# EAGLE board ciabatta (EAGLE 4.16)
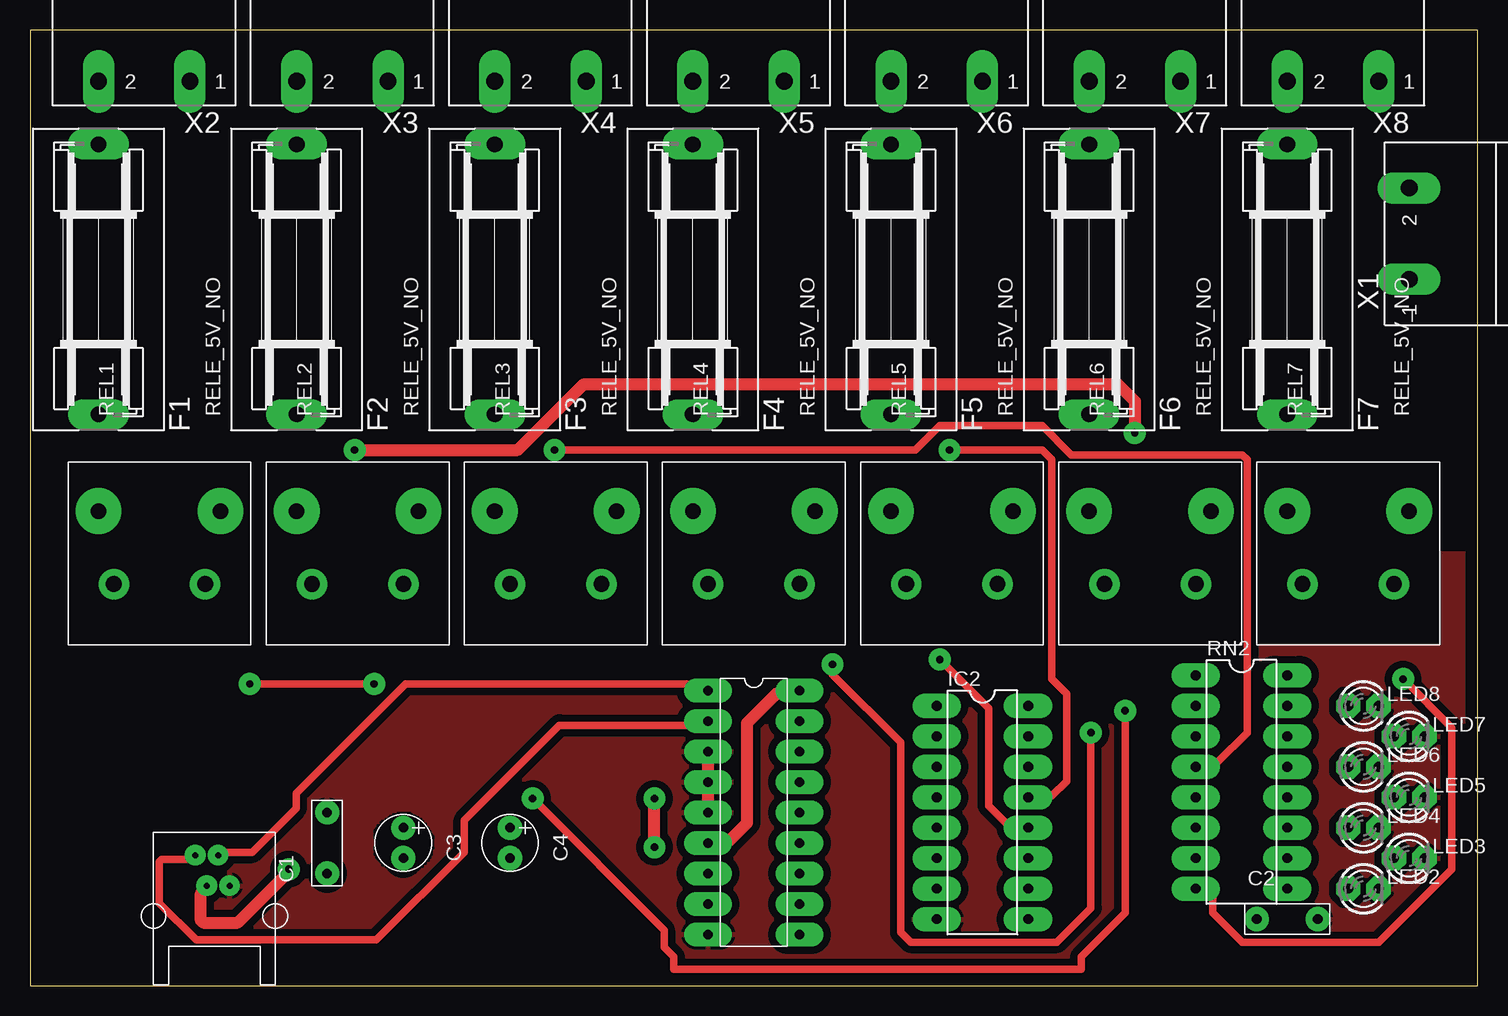
[diagram p0: board, top side]
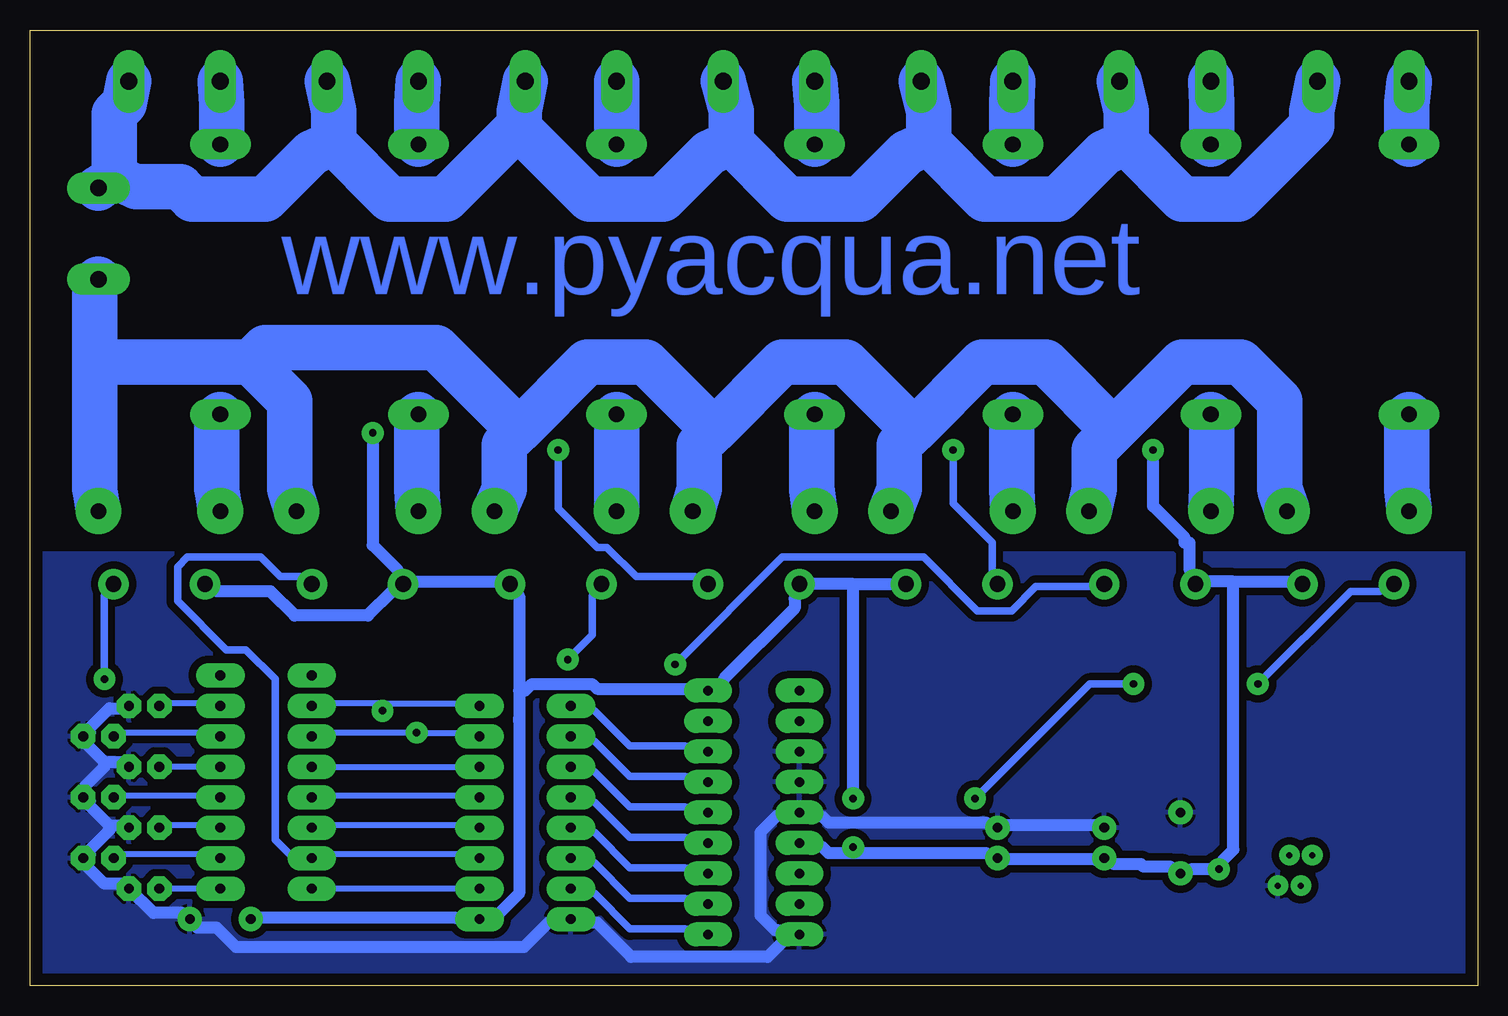
[diagram p1: board, bottom side, seen from below]

Size 120.63 x 79.68 mm. Coordinates in mm from the lower left corner, seen from the top.
Outline: 0,0 120.63,0 120.63,79.68 0,79.68 0,0
Copper layers (1*16): Top 0.035mm / dielectric 1.5mm / Bottom 0.035mm
Design rules "mio2": minimum track width 24mil, minimum drill 24mil, track to track 24mil, track to pad 24mil, pad to pad 24mil, via to via 24mil, smd to smd 24mil, copper to edge 40mil, drill to drill 8mil, minimum pad ring 24mil, minimum via ring 24mil, stop-mask expansion 4mil, vias tented up to drill 0mil, thermal gap 10mil
Net classes: 0 signal: width 0.508 mm; 1 220: width 3.81 mm; 2 signal2: width 0.508 mm; 3 vcc: width 1.016 mm; 4 smd: width 0.203 mm

## Footprints (pad centres in the part's own frame; a part is rotated, then mirrored left to right if it is on the bottom)
CAP_POLI = drill 0.8 pad 1.93 round: P$1 -5.08,0; P$2 0,0
CAP_ELET = drill 0.8 pad 1.93 round: A -2.54,0; B 0,0
SH22,5A = drill 1.321 pad 2.54 long: 1 -11.252,0; 2 11.252,0
DIL16 = drill 0.813 long: 1 -8.89,-3.81; 2 -6.35,-3.81; 3 -3.81,-3.81; 4 -1.27,-3.81; 5 1.27,-3.81; 6 3.81,-3.81; 7 6.35,-3.81; 8 8.89,-3.81; 9 8.89,3.81; 10 6.35,3.81; 11 3.81,3.81; 12 1.27,3.81; 13 -1.27,3.81; 14 -3.81,3.81; 15 -6.35,3.81; 16 -8.89,3.81
LED3MM = drill 0.813 octagon: A -1.27,0; K 1.27,0
RELE_5V_NO = drill 1.3 pad 3.81 round: COM 6.08,-1.27; NO 6.08,8.89 | drill 1.3 pad 2.54 round: L_1 0,7.62; L_2 0,0
MCP23008_DHT = drill 0.8 long: P$1 0,0; P$2 2.54,0; P$3 5.08,0; P$4 7.62,0; P$5 10.16,0; P$6 12.7,0; P$7 15.24,0; P$8 17.78,0; P$9 20.32,0; P$10 20.32,7.62; P$11 17.78,7.62; P$12 15.24,7.62; P$13 12.7,7.62; P$14 10.16,7.62; P$15 7.62,7.62; P$16 5.08,7.62; P$17 2.54,7.62; P$18 0,7.62
J-I2C = drill 0.5 pad 1.27 round: 1 -2.54,-0.635; 2 0,0.318; 3 -2.54,1.27; 4 0,2.223
GMSTBA2 = drill 1.397 long: 1 -3.81,5.08; 2 3.81,5.08

## Placement (x,y rotation side)
C1  [CAP_POLI]  24.76,14.44 90 top
C2  [CAP_POLI]  107.31,5.55 0 top
C3  [CAP_ELET]  31.11,10.63 270 top
C4  [CAP_ELET]  40,10.63 270 top
F1  [SH22,5A]  5.71,58.89 90 top
F2  [SH22,5A]  22.22,58.89 90 top
F3  [SH22,5A]  38.73,58.89 90 top
F4  [SH22,5A]  55.24,58.89 90 top
F5  [SH22,5A]  71.75,58.89 90 top
F6  [SH22,5A]  88.26,58.89 90 top
F7  [SH22,5A]  104.77,58.89 90 top
IC2  ULN2003AN  [DIL16]  79.37,14.44 270 top
LED2  [LED3MM]  111.12,8.09 0 top
LED3  [LED3MM]  114.93,10.63 0 top
LED4  [LED3MM]  111.12,13.17 0 top
LED5  [LED3MM]  114.93,15.71 0 top
LED6  [LED3MM]  111.12,18.25 0 top
LED7  [LED3MM]  114.93,20.79 0 top
LED8  [LED3MM]  111.12,23.33 0 top
REL1  RELE_5V_NO  [RELE_5V_NO]  14.6,33.49 90 top
REL2  RELE_5V_NO  [RELE_5V_NO]  31.11,33.49 90 top
REL3  RELE_5V_NO  [RELE_5V_NO]  47.62,33.49 90 top
REL4  RELE_5V_NO  [RELE_5V_NO]  64.13,33.49 90 top
REL5  RELE_5V_NO  [RELE_5V_NO]  80.64,33.49 90 top
REL6  RELE_5V_NO  [RELE_5V_NO]  97.15,33.49 90 top
REL7  RELE_5V_NO  [RELE_5V_NO]  113.66,33.49 90 top
RN2  [DIL16]  100.96,16.98 270 top
U$1  MCP23008_DHT  [MCP23008_DHT]  56.51,24.6 270 top
U$2  [DINA4_P]  -31.12,-75.73 0 top  (outside the outline)
U$3  J-I2C  [J-I2C]  16,10.88 90 top
X1  GMSTBA2  [GMSTBA2]  120.01,62.7 90 top
X2  GMSTBA2  [GMSTBA2]  9.52,80.48 180 top
X3  GMSTBA2  [GMSTBA2]  26.03,80.48 180 top
X4  GMSTBA2  [GMSTBA2]  42.54,80.48 180 top
X5  GMSTBA2  [GMSTBA2]  59.05,80.48 180 top
X6  GMSTBA2  [GMSTBA2]  75.56,80.48 180 top
X7  GMSTBA2  [GMSTBA2]  92.07,80.48 180 top
X8  GMSTBA2  [GMSTBA2]  108.58,80.48 180 top

## Library data of the parts
C1-C4 REL1-REL7 U$1 U$3 = aggiunte
F1-F7 = fuse
IC2 = uln-udn
LED2-LED8 = led
RN2 = resistor-dil
U$2 = frames
X1-X8 = con-phoenix-508

## Nets
+5V [vcc]: C1.P$1 C2.P$1 C3.B C4.B IC2.9 REL1.L_2 REL2.L_1 REL3.L_2 REL4.L_1 REL5.L_2 REL6.L_1 REL7.L_1 U$3.3
CH1: IC2.16 REL1.L_1 RN2.2
CH2: IC2.15 REL2.L_2 RN2.3
CH3: IC2.14 REL3.L_1 RN2.4
CH4: IC2.13 REL4.L_2 RN2.5
CH5: IC2.12 REL5.L_1 RN2.6
CH6: IC2.11 REL6.L_2 RN2.7
CH7: IC2.10 REL7.L_2 RN2.8
GND: C1.P$2 C2.P$2 C3.A C4.A IC2.8 LED2.K LED3.K LED4.K LED5.K LED6.K LED7.K LED8.K U$1.P$3 U$1.P$4 U$1.P$5 U$1.P$9 U$3.1
LED1: LED2.A RN2.9
LED2: LED3.A RN2.10
LED3: LED4.A RN2.11
LED4: LED5.A RN2.12
LED5: LED6.A RN2.13
LED6: LED7.A RN2.14
LED7: LED8.A RN2.15
N$1 [220]: F3.1 REL3.NO
N$2 [vcc]: U$1.P$6 U$1.P$18
N$3: U$1.P$1 U$3.2
N$4: U$1.P$2 U$3.4
N$9 [220]: F2.1 REL2.NO
N$11 [220]: F1.1 REL1.NO
N$13 [220]: F4.1 REL4.NO
N$15 [220]: F5.1 REL5.NO
N$16 [220]: F5.2 X6.2
N$17 [220]: F4.2 X5.2
N$18 [220]: F3.2 X4.2
N$19 [220]: F7.1 REL7.NO
N$20 [220]: F6.1 REL6.NO
N$21 [220]: F6.2 X7.2
N$22 [220]: F7.2 X8.2
N$23 [220]: X1.2 X2.1 X3.1 X4.1 X5.1 X6.1 X7.1 X8.1
N$24 [220]: REL1.COM REL2.COM REL3.COM REL4.COM REL5.COM REL6.COM REL7.COM X1.1
N$25 [220]: F1.2 X2.2
N$26 [220]: F2.2 X3.2
OUT1: IC2.7 U$1.P$10
OUT2: IC2.6 U$1.P$11
OUT3: IC2.5 U$1.P$12
OUT4: IC2.4 U$1.P$13
OUT5: IC2.3 U$1.P$14
OUT6: IC2.2 U$1.P$15
OUT7: IC2.1 U$1.P$16

## Tracks (layer width: path | path; a pad name or v marks a point on that pad's centre or on a via)
+5V  (via drill 0.61)
  Top 1.016: v21.56,9.72 21.56,9.51 17.29,5.25 14.45,5.25 14.24,5.45 14.24,7.68 U$3.3 | v52.04,11.54 v52.04,15.61 | v27.05,44.67 40.66,44.67 46.15,50.15 90.65,50.15 92.07,48.73 v92.07,46.09
  Bottom 1.016: REL1.L_2 15.67,33.69 20.34,33.69 | 65.25,24.75 73.38,24.75 73.78,25.16 78.81,25.16 79.37,24.6 79.88,24.6 | 79.88,22.06 79.88,7.68 81.91,5.65 IC2.9 85.16,5.65 101.42,5.65 C2.P$1 | 79.88,22.06 79.88,22.31 | REL6.L_1 88.41,33.69 81.5,33.69 REL5.L_2 79.88,32.47 79.88,24.6 | REL7.L_1 105.07,32.88 100.6,32.88 98.57,30.85 92.48,30.85 90.44,32.88 REL6.L_1 | 20.34,33.69 22.58,33.69 REL2.L_1 24,34.71 24,36.94 24.4,36.94 24.4,37.35 27.05,39.99 v27.05,44.67 | 52.04,33.49 REL3.L_2 | 52.04,33.49 REL4.L_1 56.92,32.27 56.92,31.46 62.81,25.57 | 52.04,11.04 40.97,11.04 C4.B 39.24,10.53 31.92,10.53 C3.B 30.3,10.12 28.06,10.12 27.86,9.92 25.62,9.92 C1.P$1 23.79,9.72 v21.56,9.72 21.15,10.53 20.34,11.34 20.34,33.69 | 52.04,11.04 54.07,11.04 54.58,11.54 | 79.88,24.6 79.88,22.06 | v52.04,15.61 52.04,33.49 | 52.04,11.04 v52.04,11.54 | v92.07,46.09 92.07,36.74 90.04,34.71 REL6.L_1
CH1  (via drill 0.61)
  Top 0.61: v18.31,25.16 v28.67,25.16 | v41.88,15.61 52.85,4.64 52.85,3.21 53.66,2.4 53.66,1.38 87.6,1.38 87.6,2.4 91.26,6.06 v91.26,22.92
  Bottom 0.508: IC2.16 84.35,23.53 91.26,23.53 96.13,23.53 RN2.2
  Bottom 0.61: v18.31,25.16 10.59,32.88 8.15,32.88 REL1.L_1 | v28.67,25.16 32.33,25.16 v41.88,15.61 | v91.26,22.92 91.26,23.53
CH2  (via drill 0.61)
  Top 0.61: v66.87,26.78 66.87,25.97 72.56,20.28 72.56,4.43 73.38,3.62 85.57,3.62 88.41,6.46 v88.41,21.1
  Bottom 0.508: IC2.15 84.35,21.1 v88.41,21.1 96.13,21.1 RN2.3
  Bottom 0.61: v66.87,26.78 57.93,35.72 46.15,35.72 41.68,31.25 38.83,31.25 36.8,33.29 32.33,33.29 REL2.L_2
CH3  (via drill 0.61)
  Top 0.61: v43.71,44.67 73.78,44.67 75.81,46.7 84.35,46.7 86.79,44.26 101.01,44.26 101.42,43.85 101.42,21.1 98.98,18.66 RN2.4
  Bottom 0.508: RN2.4 IC2.14
  Bottom 0.61: v43.71,44.67 43.71,40.2 40.46,36.94 40.46,34.51 REL3.L_1
CH4  (via drill 0.61)
  Top 0.61: v76.63,44.67 84.35,44.67 85.16,43.85 85.16,25.57 86.38,24.35 86.38,17.03 85.16,15.81 IC2.13
  Bottom 0.508: IC2.13 84.35,15.81 96.13,15.81 RN2.5
  Bottom 0.61: v76.63,44.67 76.63,39.79 73.38,36.54 72.56,36.54 70.12,34.1 65.25,34.1 REL4.L_2
CH5  (via drill 0.61)
  Top 0.61: v75.81,27.19 79.88,23.13 79.88,15 81.5,13.37 IC2.12
  Bottom 0.508: IC2.12 84.35,13.37 96.13,13.37 RN2.6
  Bottom 0.61: v75.81,27.19 73.78,29.22 73.78,32.47 REL5.L_1
CH6
  Bottom 0.508: IC2.11 84.35,10.93 96.13,10.93 RN2.7
  Bottom 0.61: REL6.L_2 98.17,34.1 99.79,34.1 101.42,35.72 107.51,35.72 108.33,34.91 108.33,32.07 104.26,28 102.64,28 100.2,25.57 100.2,12.15 98.98,10.93 RN2.7
CH7  (via drill 0.61)
  Top 0.61: v114.42,25.57 118.49,21.5 118.49,9.72 112.39,3.62 101.01,3.62 98.57,6.06 98.57,7.28 RN2.8
  Bottom 0.508: IC2.10 RN2.8
  Bottom 0.61: v114.42,25.57 114.42,32.47 REL7.L_2
GND
  Top 1.016: U$1.P$5 U$1.P$4 U$1.P$3
  Bottom 1.016: 114.02,13.37 112.8,13.37 LED4.K | 114.02,13.37 115.64,15 115.64,15.41 LED5.K 116.05,16.22 116.05,16.62 114.42,18.25 114.42,18.66 | 114.42,18.66 112.8,18.66 LED6.K | 114.42,18.66 116.05,20.28 LED7.K 115.64,21.1 115.64,21.5 114.02,23.13 112.8,23.13 LED8.K | 114.02,13.37 114.02,12.97 115.64,11.34 115.64,10.93 LED3.K 116.05,10.12 114.42,8.5 112.8,8.5 LED2.K 110.36,6.06 107.92,6.06 C2.P$2 106.7,4.84 105.07,4.84 103.45,3.21 79.47,3.21 77.44,5.25 IC2.8 74.59,5.25 73.38,5.25 70.53,2.4 59.15,2.4 57.53,4.03 U$1.P$9 58.34,4.64 58.54,4.64 59.76,5.86 59.76,12.76 58.34,14.19 U$1.P$5 54.58,14.08 54.07,13.58 40.97,13.58 C4.A 39.24,13.37 31.92,13.37 C3.A
  pour Top: 0.63,34.76 0.63,36.03 120.01,36.03 120.01,0.47 0.63,0.47 0.63,36.03
  pour Bottom: 0.63,36.03 0.63,0.47 120.01,0.47 120.01,36.03
LED1
  Bottom 0.508: RN2.9 LED2.A
LED2
  Bottom 0.508: RN2.10 105.89,10.93 113.2,10.93 LED3.A
LED3
  Bottom 0.508: RN2.11 105.89,13.37 109.55,13.37 LED4.A
LED4
  Bottom 0.508: RN2.12 105.89,15.81 113.2,15.81 LED5.A
LED5
  Bottom 0.508: RN2.13 LED6.A
LED6
  Bottom 0.508: RN2.14 105.89,21.1 113.2,21.1 LED7.A
LED7
  Bottom 0.508: RN2.15 105.89,23.53 109.55,23.53 LED8.A
N$1
  Bottom 3.81: F3.1 38.83,46.7 38.83,41.42 REL3.NO
N$2
  Top 1.016: U$1.P$18 62.2,24.35 59.76,21.91 59.76,13.58 58.34,12.15 U$1.P$6
N$3
  Top 0.61: U$3.2 16.48,11.14 18.51,11.14 22.17,14.8 22.17,16.02 31.31,25.16 54.68,25.16 U$1.P$1
N$4
  Top 0.61: U$3.4 13.03,10.53 10.99,10.53 10.79,10.32 10.79,6.87 13.84,3.82 28.88,3.82 36.19,11.14 36.19,13.78 44.12,21.7 54.68,21.7 U$1.P$2
N$9
  Bottom 3.81: F2.1 22.17,46.7 22.17,41.42 REL2.NO
N$11
  Bottom 3.81: F1.1 5.91,46.7 5.91,41.42 REL1.NO
N$13
  Bottom 3.81: F4.1 55.49,46.7 55.49,41.42 REL4.NO
N$15
  Bottom 3.81: REL5.NO F5.1
N$16
  Bottom 3.81: F5.2 X6.2
N$17
  Bottom 3.81: X5.2 55.09,73.52 55.09,71.08 F4.2
N$18
  Bottom 3.81: X4.2 38.83,73.52 38.83,71.08 F3.2
N$19
  Bottom 3.81: F7.1 105.07,46.7 105.07,41.42 REL7.NO
N$20
  Bottom 3.81: F6.1 88.41,46.7 88.41,41.42 REL6.NO
N$21
  Bottom 3.81: X7.2 88.41,73.52 88.41,71.08 F6.2
N$22
  Bottom 3.81: X8.2 104.67,73.52 104.67,71.08 F7.2
N$23
  Bottom 3.81: 113.61,67.42 113.61,72.71 112.8,73.52 X8.1 | 113.61,67.42 X1.2 | 79.98,71.59 85.97,65.6 90.65,65.6 95.32,70.27 | 79.98,71.59 79.88,71.69 79.88,72.91 X6.1 | 95.32,70.27 95.32,72.91 X7.1 | 113.61,67.42 111.78,66.61 108.12,66.61 107.11,65.6 101.01,65.6 97.15,69.46 95.32,70.27 | 29.28,70.27 24.61,65.6 19.93,65.6 13.84,71.69 13.84,72.91 X2.1 | 29.28,70.27 29.28,72.91 X3.1 | 45.74,70.27 45.74,72.91 X4.1 | 45.74,70.27 41.07,65.6 34.97,65.6 31.11,69.46 29.28,70.27 | 62.2,70.27 62.2,72.91 X5.1 | 62.2,70.27 57.53,65.6 51.43,65.6 47.57,69.46 45.74,70.27 | 79.98,71.59 73.98,65.6 67.89,65.6 64.03,69.46 62.2,70.27
N$24
  Bottom 3.81: 115.23,51.98 115.23,41.42 REL7.COM | 115.23,51.98 115.23,58.08 X1.1 | 102.23,51.98 98.98,48.73 98.98,41.42 REL6.COM | 102.23,51.98 115.23,51.98 | 30.3,46.29 31.92,44.67 31.92,41.42 REL2.COM | 30.3,46.29 24.61,51.98 19.73,51.98 16.48,48.73 16.48,41.42 REL1.COM | 46.96,46.29 41.27,51.98 35.99,51.98 30.3,46.29 | 46.96,46.29 48.18,45.07 48.18,41.42 REL3.COM | 63.62,46.29 57.93,51.98 52.65,51.98 46.96,46.29 | 63.62,46.29 64.84,45.07 64.84,41.42 REL4.COM | 79.88,46.29 74.19,51.98 69.31,51.98 63.62,46.29 | 79.88,46.29 81.1,45.07 81.1,41.42 REL5.COM | 102.23,51.98 101.01,53.2 86.79,53.2 79.88,46.29
N$25
  Bottom 3.81: X2.2 5.91,73.52 5.91,71.08 F1.2
N$26
  Bottom 3.81: X3.2 22.17,73.52 22.17,71.08 F2.2
OUT1
  Bottom 0.61: U$1.P$10 66.06,4.74 70.63,4.74 73.58,7.68 IC2.7
OUT2
  Bottom 0.61: U$1.P$11 66.06,7.28 70.63,7.28 73.58,10.22 IC2.6
OUT3
  Bottom 0.61: U$1.P$12 66.06,9.82 70.63,9.82 73.58,12.76 IC2.5
OUT4
  Bottom 0.61: U$1.P$13 66.06,12.36 70.63,12.36 73.58,15.3 IC2.4
OUT5
  Bottom 0.61: U$1.P$14 66.06,14.9 70.63,14.9 73.58,17.84 IC2.3
OUT6
  Bottom 0.61: U$1.P$15 66.06,17.44 70.63,17.44 73.58,20.38 IC2.2
OUT7
  Bottom 0.61: U$1.P$16 66.06,19.98 70.63,19.98 73.58,22.92 IC2.1

## Text on the board
Bottom: www.pyacqua.net